# Altium PCB Project_Xe_Can_Bang.PcbDoc
Units mil, origin at the board's own origin, x right, y up, seen from the top; angles counter-clockwise.
Board outline 6000 x 4000 mil, 2 copper layers (Top Layer, Bottom Layer); 73 components, 90 nets, 295 pads, 0 vias.
Unrouted connection lines stored in the file: 185.
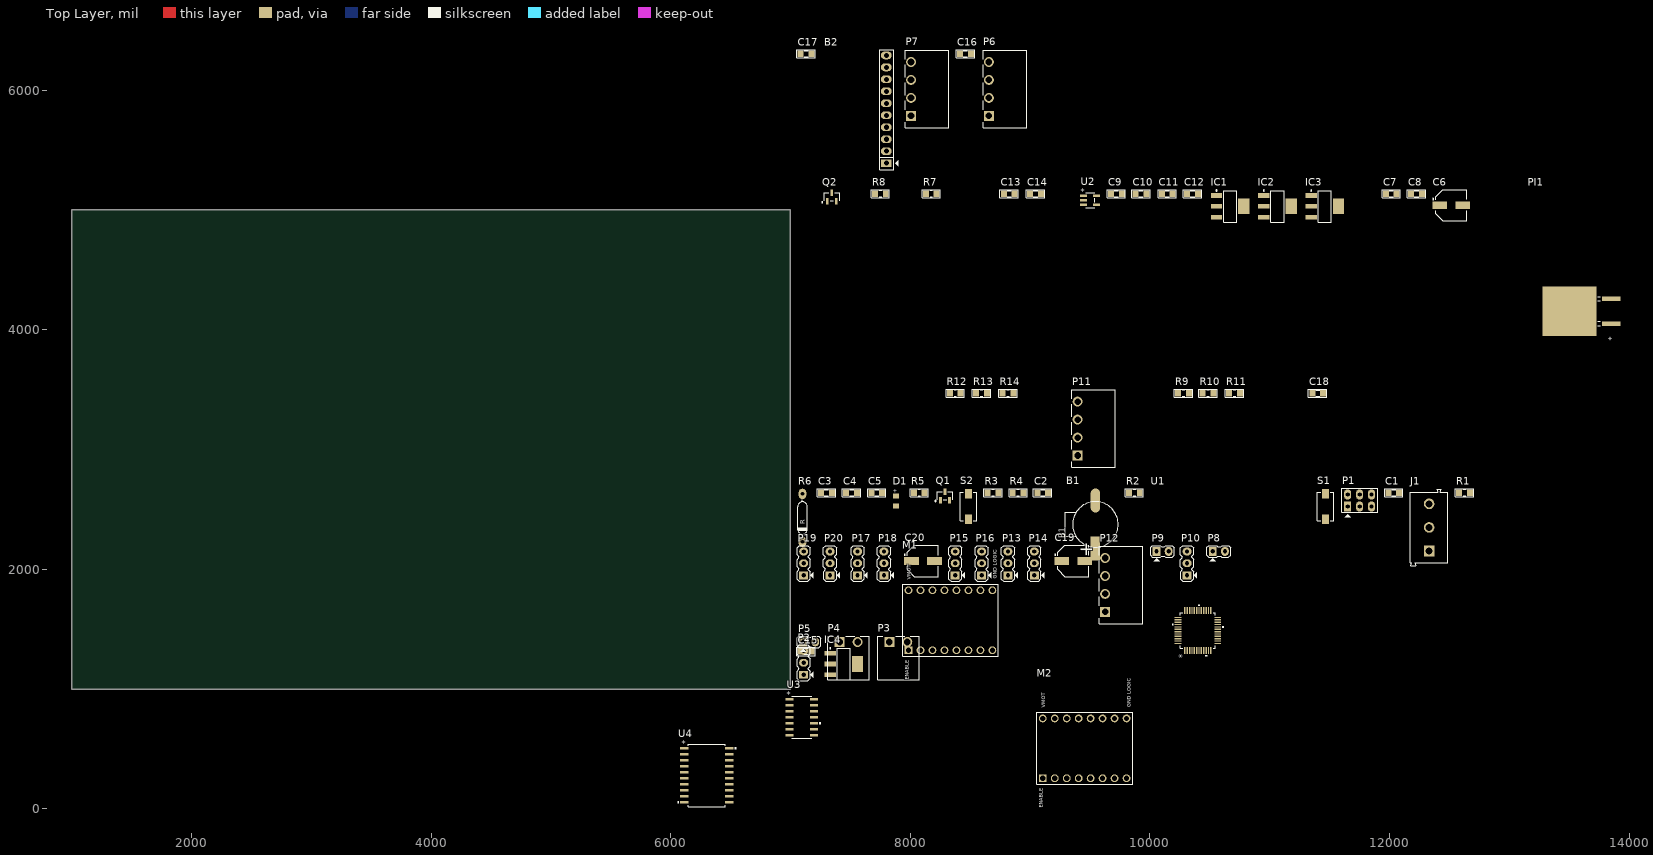
[diagram p0: Top Layer view]
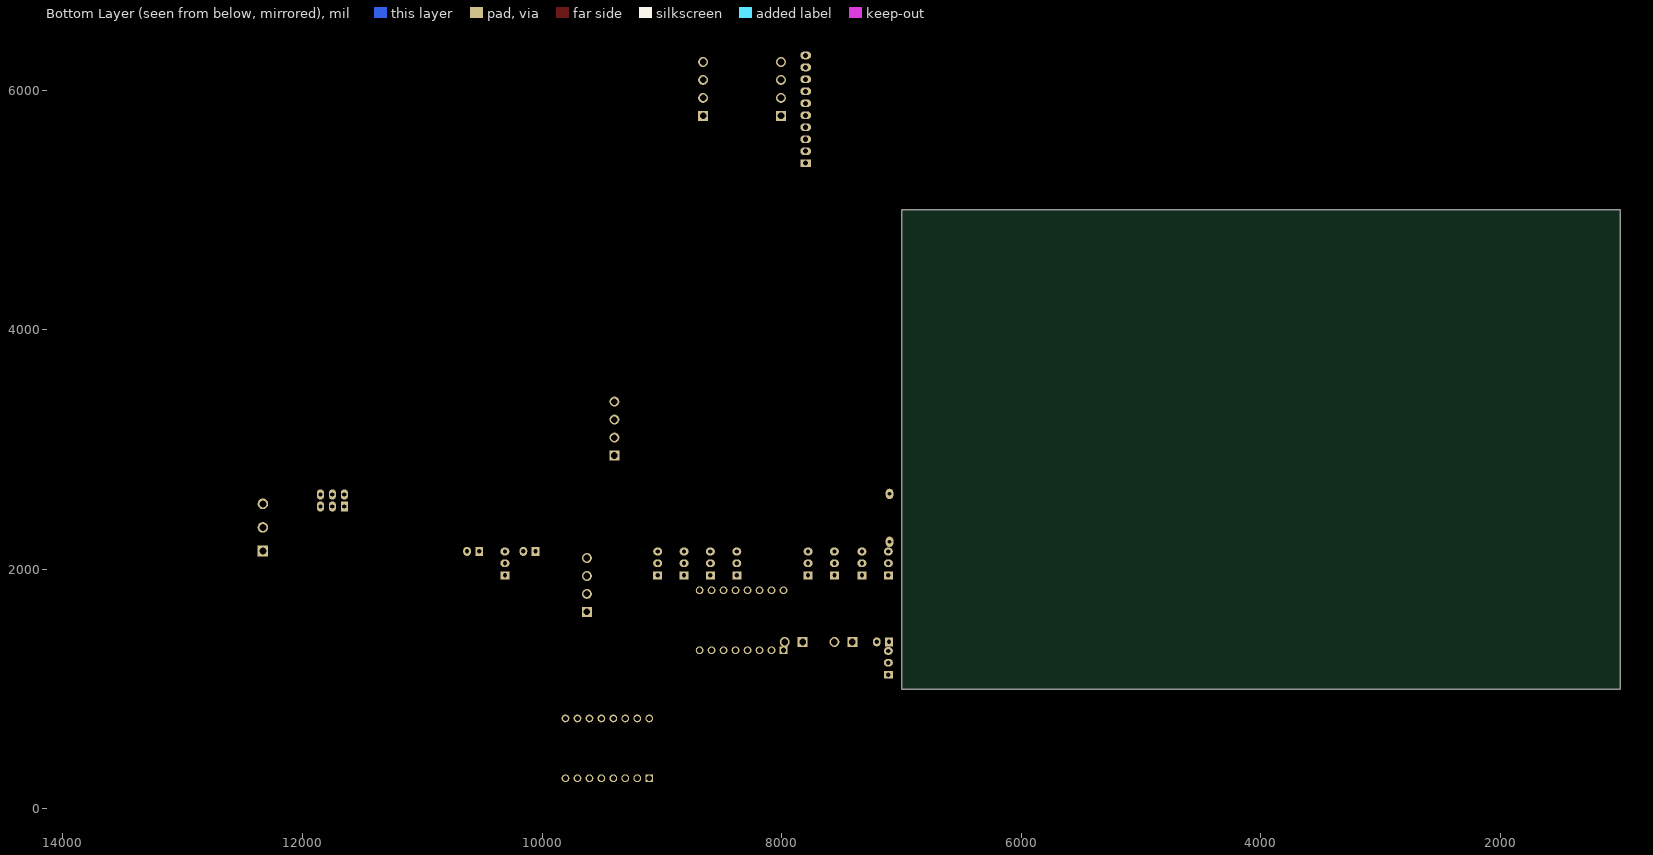
[diagram p1: Bottom Layer view, seen from below]

## Layer stack, top to bottom
Top Solder: solder mask 0.4, Solder Resist, Dk 3.5
Top Layer: signal copper 1.4
Dielectric 1: dielectric 12.6, FR-4, Dk 4.8
Bottom Layer: signal copper 1.4
Bottom Solder: solder mask 0.4, Solder Resist, Dk 3.5

## Board outline
1000,1000 7000,1000 7000,5000 1000,5000

## Design rules (kind name [scope] priority, off if disabled: settings)
Clearance [All] p1: gap=8 ignorepadtopadclearanceinfootprint=FALSE
DiffPairsRouting [All] p1: maxlimit=10 minlimit=8 mostfreqgap=10 toplayer_minwidth=8 toplayer_maxwidth=15 toplayer_prefwidth=10 bottomlayer_minwidth=8 bottomlayer_maxwidth=15 bottomlayer_prefwidth=10 maxuncoupledlength=500
Height [All] p1: minheight=0 maxheight=5000 prefheight=500
PolygonConnect [All] p1: connectstyle=Direct reliefconductorwidth=10 reliefentries=4 polygonreliefangle="90 Angle" airgapwidth=10
RoutingVias [All] p1: holewidth=15.75 width=31.5 viastyle="Through Hole" minholewidth=15.75 minwidth=31.5 maxholewidth=15.75 maxwidth=31.5
SolderMaskExpansion [All] p1: expansion=4
UnRoutedNet [All] p1: checkbadconnections=TRUE
Width [All] p1: maxlimit=15 minlimit=8 preferedwidth=10
27 further rules are at their usual default settings.

## Classes and differential pairs
component class Sensor: B2 C16 C17 P6 P7 ts U3
component class Power_Supply: C6 C7 C8 C9 C10 C11 C12 C13 C14 C15 IC1 IC2 IC3 IC4 P3 P4 P5 PI1 Q2 R7 R8 U2
component class Motor_Controller: C18 C19 M1 M2 M*1 M*2 P11 P15 P16 P17 P18 P19 P20 R8 R9 R11 R12 R13 R14 S3 S4 U4 U5
component class MCU: B1 C1 C2 C3 C4 C5 D1 J1 P1 Q1 R1 R2 R3 R4 R5 R6 S1 S2 U1

## Components (designator, comment, footprint, x,y, rotation, side; value= is the part's Value field where it differs from the comment)
B1 "Buzzer" "BUZZER SMD" 9545,2275 r90 top
B2 "MPU9250" MPU9250 7800,5390 r90 top
C1 "Cap-100nF-50V-0805" CAP-SM-0805 11990,2640 r0 top value=100nF/50V
C2 "Cap-100nF-50V-0805" CAP-SM-0805 9060,2640 r0 top value=100nF/50V
C3 "Cap-100nF-50V-0805" CAP-SM-0805 7255,2640 r0 top value=100nF/50V
C4 "Cap-100nF-50V-0805" CAP-SM-0805 7465,2640 r0 top value=100nF/50V
C5 "Cap-100nF-50V-0805" CAP-SM-0805 7675,2640 r0 top value=100nF/50V
C6 "Cap-Al-100uF-16V-D6L5" CAP-SM-AL-SIZE-D-D6L6 12515,5040 r0 top value=100uF/16V
C7 "Cap-10uF-50V-0805" CAP-SM-0805 11970,5135 r0 top value=10uF/50V
C8 "Cap-10uF-50V-0805" CAP-SM-0805 12180,5135 r0 top value=10uF/50V
C9 "Cap-10uF-50V-0805" CAP-SM-0805 9675,5135 r0 top value=10uF/50V
C10 "Cap-10uF-50V-0805" CAP-SM-0805 9880,5135 r0 top value=10uF/50V
C11 "Cap-10uF-50V-0805" CAP-SM-0805 10100,5135 r0 top value=10uF/50V
C12 "Cap-10uF-50V-0805" CAP-SM-0805 10310,5135 r0 top value=10uF/50V
C13 "Cap-100nF-50V-0805" CAP-SM-0805 8780,5135 r0 top value=100nF/50V
C14 "Cap-10uF-50V-0805" CAP-SM-0805 9000,5135 r0 top value=10uF/50V
C15 "Cap-10uF-50V-0805" CAP-SM-0805 7085,1315 r0 top value=10uF/50V
C16 "Cap-100nF-50V-0805" CAP-SM-0805 8415,6305 r0 top value=100nF/50V
C17 "Cap-100nF-50V-0805" CAP-SM-0805 7085,6305 r0 top value=100nF/50V
C18 "Cap-100nF-50V-0805" CAP-SM-0805 11355,3470 r0 top value=100nF/50V
C19 "Cap-Al-100uF-16V-D6L5" CAP-SM-AL-SIZE-D-D6L6 9360,2070 r0 top value=100uF/16V
C20 "Cap-Al-100uF-16V-D6L5" CAP-SM-AL-SIZE-D-D6L6 8105,2070 r0 top value=100uF/16V
D1 "Red, 2V" WL-SMCW_0805 7880,2570 r90 top
IC1 "AMS1117" SOT223 10670,5030 r0 top value=LM317
IC2 "AMS1117" SOT223 11065,5030 r0 top value=LM317
IC3 "AMS1117" SOT223 11460,5030 r0 top value=LM317
IC4 "AMS1117" SOT223 7445,1210 r0 top value=LM317
J1 "691111710003" 691111710003 12330,2350 r90 top
M1 "DRV8825" IC_DRV8825_STEPPER_MOTOR_DRIVER_CARRIER 8335,1575 r90 top
M2 "DRV8825" IC_DRV8825_STEPPER_MOTOR_DRIVER_CARRIER 9455,506 r90 top
P1 "Header 3X2" JP3x2 11650,2525 r0 top
P2 "Header 3" JP3 7110,1220 r90 top
P3 "691322310002" 691322310002 7900,1260 r0 top
P4 "691322310002" 691322310002 7485,1260 r0 top
P5 "Header 2" JP2 7105,1395 r0 top
P6 "691322310004" 691322310004 8790,6010 r90 top
P7 "691322310004" 691322310004 8140,6010 r90 top
P8 "Header 2" JP2 10525,2150 r0 top
P9 "Header 2" JP2 10055,2150 r0 top
P10 "Header 3" JP3 10310,2050 r90 top
P11 "691322310004" 691322310004 9530,3175 r90 top
P12 "691322310004" 691322310004 9760,1870 r90 top
P13 "Header 3" JP3 8815,2050 r90 top
P14 "Header 3" JP3 9035,2050 r90 top
P15 "Header 3" JP3 8375,2050 r90 top
P16 "Header 3" JP3 8595,2050 r90 top
P17 "Header 3" JP3 7560,2050 r90 top
P18 "Header 3" JP3 7780,2050 r90 top
P19 "Header 3" JP3 7110,2050 r90 top
P20 "Header 3" JP3 7330,2050 r90 top
PI1 "L7805-SMD" D2PAK_STM 13500,4155 r90 top
Q1 "MMBT3904-1AM" SOT23_NEX 8290,2615 r0 top
Q2 "MMBT3904-1AM" SOT23_NEX 7345,5110 r0 top
R1 "Res-10k-0805" RES-SM-0805 12580,2640 r0 top value=10K
R2 "Res-10k-0805" RES-SM-0805 9825,2640 r0 top value=10K
R3 "Res-100K-0805" RES-SM-0805 8645,2640 r0 top value=100K
R4 "Res-15K-0805" RES-SM-0805 8855,2640 r0 top value=15K
R5 "Res-100K-0805" RES-SM-0805 8030,2640 r0 top value=100K
R6 "Resistor 1/4W" "RES 1/4W" 7100,2230 r90 top value=1K
R7 "Res-4.7K-0805" RES-SM-0805 8130,5135 r0 top value=4.7K
R8 "Res-100K-0805" RES-SM-0805 7705,5135 r0 top value=100K
R9 "Res-1K-0805" RES-SM-0805 10235,3470 r0 top value=1K
R10 "Res-1K-0805" RES-SM-0805 10440,3470 r0 top value=1K
R11 "Res-1K-0805" RES-SM-0805 10660,3470 r0 top value=1K
R12 "Res-1K-0805" RES-SM-0805 8330,3470 r0 top value=1K
R13 "Res-1K-0805" RES-SM-0805 8550,3470 r0 top value=1K
R14 "Res-1K-0805" RES-SM-0805 8770,3470 r0 top value=1K
S1 "434113043826" 434113043826 11465,2525 r90 top
S2 "434113043826" 434113043826 8485,2525 r90 top
U1 "Part Number: STM32F103C8T6" "LQFP - 48" 10400,1490 r90 top value=Value
U2 "XC6204B332MR" XC6204/05_SOT-00 9500,5080 r0 top
U3 "74HC14D,652" SOT108-1_NEX 7095,766 r0 top
U4 "74HC245D,652" SOT163-1_NEX 6302,281 r0 top

## Footprints (in the part's own frame and the unit in brackets; to place one, negate y for a bottom-side part, rotate by r counter-clockwise, add the part's x,y. Pads: shape width x height; smd on the part's side, far side on the other; paste and mask are expansions set on the pad)
434113043826 [mm] "SMD Tact Switch, body 6x3.5mm"
  rect 2x1.5 smd: 1(-2.7,0) 2(2.7,0)
  silkscreen extent -3,-1.75 3,1.75, body extent -3.65,-1.75 3.65,1.75, height 4.3
691111710003 [mm] "5,00mm - modular - green - Horizontal entry with pressure clamp - 10,0mm height - 03p"
  rect 2.25x2.25 hole 1.5: 1(-5,0)
  round 2.25 hole 1.5: 2(0,0) 3(5,0)
  silkscreen extent -8.1,-4 8.1,4, body extent -8.1,-4 8.1,4, height 11.05
691322310002 [mm] "Horizontal PCB Header, pitch 3.81mm, 02p"
  rect 2.1x2.1 hole 1.4: 1(-1.905,3.4)
  round 2.1 hole 1.4: 2(1.905,3.4)
  silkscreen extent -4.4,-4.6 4.41,4.6, body extent -4.4,-4.6 4.41,4.6, height 7.25
691322310004 [mm] "Horizontal PCB Header, pitch 3.81mm, 04p"
  rect 2.1x2.1 hole 1.4: 1(-5.715,3.4)
  round 2.1 hole 1.4: 2(-1.905,3.4) 3(1.905,3.4) 4(5.715,3.4)
  silkscreen extent -8.21,-4.6 8.22,4.6, body extent -8.21,-4.6 8.21,4.6, height 7.25
"BUZZER SMD" [mil]
  rect 200x80 smd: 1(-100,0)
  oval 200x80 smd: 2(300,0)
  silkscreen extent -90,-190 290,250
CAP-SM-0805 [mil]
  rect 50x55 smd: 1(0,0) 2(90,0)
  silkscreen extent -32,-34 121,33, body extent 6,-25 84,25, height 31
CAP-SM-AL-SIZE-D-D6L6 [mm] "WH6.6"
  rect 3.15x1.6 smd: 1(-2.45,0) 2(2.45,0)
  silkscreen extent -3.95,-3.3 3.3,3.3, body extent -3.9,-3.4 3.9,3.4, height 5.7
D2PAK_STM [mil]
  rect 39x154 smd paste+0 mask+0: 1(-103.94,-349.5) 3(103.94,-349.5)
  rect 411x451 smd paste+0 mask+0: 2(0,0)
  silkscreen extent -122,-258 122,-239, body extent 0,0 10,10, height 10
IC_DRV8825_STEPPER_MOTOR_DRIVER_CARRIER [mm]
  rect 1.65x1.65 hole 1.1: 1(-6.35,8.89)
  round 1.65 hole 1.1: 2(-6.35,6.35) 3(-6.35,3.81) 4(-6.35,1.27) 5(-6.35,-1.27) 6(-6.35,-3.81) 7(-6.35,-6.35) 8(-6.35,-8.89) 9(6.35,-8.89) 10(6.35,-6.35) 11(6.35,-3.81) 12(6.35,-1.27) 13(6.35,1.27) 14(6.35,3.81) 15(6.35,6.35) 16(6.35,8.89)
  silkscreen extent -7.62,-10.16 7.62,10.16, body extent -7.5,-10.29 7.5,10.03, height 13.82
JP2 [mil]
  rect 65x75 hole 36: 1(0,0)
  oval 65x75 hole 36: 2(101,0)
  silkscreen extent -49,-81 148,48, body extent -48,-50 148,48, height 323
JP3 [mil] "Jumper 3"
  rect 65x75 hole 36: 1(-100,0)
  oval 65x75 hole 36: 2(1,0) 3(99,0)
  silkscreen extent -150,-81 149,55, body extent -150,-60 150,55, height 355
JP3x2 [mil] "Connector 3x2"
  rect 60x86 hole 36: 1(0,0)
  oval 60x86 hole 36: 2(0,100) 3(100,0) 4(100,100) 5(200,0) 6(200,100)
  silkscreen extent -50,-91 253,150, body extent -50,-50 250,150, height 335
"LQFP - 48" [mil]
  rect 58x11 smd: 1(-166,108.27) 2(-166,88.58) 3(-166,68.9) 4(-166,49.21) 5(-166,29.53) 6(-166,9.84) 7(-166,-9.84) 8(-166,-29.53) 9(-166,-49.21) 10(-166,-68.9) 11(-166,-88.58) 12(-166,-108.27) 25(166,-108.27) 26(166,-88.58) 27(166,-68.9) 28(166,-49.21) 29(166,-29.53) 30(166,-9.84) 31(166,9.84) 32(166,29.53) 33(166,49.21) 34(166,68.9) 35(166,88.58) 36(166,108.27)
  rect 11x58 smd: 13(-108.27,-166) 14(-88.58,-166) 15(-68.9,-166) 16(-49.21,-166) 17(-29.53,-166) 18(-9.84,-166) 19(9.84,-166) 20(29.53,-166) 21(49.21,-166) 22(68.9,-166) 23(88.58,-166) 24(108.27,-166) 37(108.27,166) 38(88.58,166) 39(68.9,166) 40(49.21,166) 41(29.53,166) 42(9.84,166) 43(-9.84,166) 44(-29.53,166) 45(-49.21,166) 46(-68.9,166) 47(-88.58,166) 48(-108.27,166)
  silkscreen extent -215,-215 215,215, body extent -175,-178 180,178, height 59
MPU9250 [mil] "JP8"
  rect 65x90 hole 42: 1(0,0)
  oval 65x90 hole 42: 2(100,0) 3(200,0) 4(300,0) 5(400,0) 6(500,0) 7(600,0) 7(800,0) 8(700,0) 8(900,0)
  silkscreen extent -56,-100 945,57, body extent -50,-61 950,530, height 267
"RES 1/4W" [mm]
  oval 2.2x1.6 hole 0.787: 1(0,0) 2(10.16,0)
  silkscreen extent 1.26,-1.02 8.88,1.02, body extent -0.3,-1.16 10.46,1.16, height 2.93
RES-SM-0805 [mil]
  rect 50x55 smd: 1(0,0) 2(90,0)
  silkscreen extent -31,-34 121,34, body extent -5,-24 95,25, height 20
SOT23_NEX [mil]
  rect 22x52 smd paste+0 mask+4: 1(-37.5,-37.21) 2(37.5,-37.21) 3(0,33.36)
  silkscreen extent -85,-50 64,32, body extent -59,-54 59,44, height 43
SOT108-1_NEX [mil]
  rect 67x21 smd paste+0 mask+0: 1(-102.5,150) 2(-102.5,100) 3(-102.5,50) 4(-102.5,0) 5(-102.5,-50) 6(-102.5,-100) 7(-102.5,-150) 8(102.5,-150) 9(102.5,-100) 10(102.5,-50) 11(102.5,0) 12(102.5,50) 13(102.5,100) 14(102.5,150)
  silkscreen extent -84,-177 156,177, body extent 0,0 10,10, height 10
SOT163-1_NEX [mil]
  rect 71x21 smd paste+0 mask+0: 1(-188,225) 2(-188,175) 3(-188,125) 4(-188,75) 5(-188,25) 6(-188,-25) 7(-188,-75) 8(-188,-125) 9(-188,-175) 10(-188,-225) 11(188,-225) 12(188,-175) 13(188,-125) 14(188,-75) 15(188,-25) 16(188,25) 17(188,75) 18(188,125) 19(188,175) 20(188,225)
  silkscreen extent -244,-261 244,261, body extent 0,0 10,10, height 10
SOT223 [mm] "SOT223, 4-Leads, Body 6.5x3.5mm, Pitch 2.3mm, Lead Span 7mm, IPC Medium Density"
  rect 2.4x1 smd: 1(-2.9,2.3) 2(-2.9,0) 3(-2.9,-2.3)
  rect 2.4x3.3 smd: 4(2.9,0)
  silkscreen extent -3.02,-3.35 1.4,3.47, body extent -3.39,-3.27 3.5,3.23, height 1.72
WL-SMCW_0805 [mm] "SMD Mono-color Chip LED, body 2.0x1.25mm"
  rect 1.1x1.2 smd: 1(-1.05,0) 2(1.05,0)
  body extent -1,-0.63 1,0.62, height 0.7
XC6204/05_SOT-00 [mil]
  rect 60x21 smd: 1(-54.75,37.4) 2(-54.75,0) 3(-54.75,-37.4) 4(54.75,-37.4) 5(54.75,37.4)
  silkscreen extent -38,-62 38,62, body extent -56,-57 54,57, height 51

## Part data
C1 C2 C3 C4 C5 C13 C16 C17 C18: "CAP CER 0.1UF 50V Y5V 0805", Manufacturer="Samsung Electro-Mechanics", Manufacturer Part Number=CL21F104ZBCNNNC, Supplier 1 Part Number=1276-1007-1-ND, Local Supplier=thegioiic, Local Supplier Link=https://thegioiic.com/products/tu-100nf-0-1uf-50v-0805, Supplier 1=Digikey, Supplier 1 Link=https://www.digikey.com/product-detail/en/samsung-electro-mechanics/CL21F104ZBCNNNC/1276-1007-1-ND/3889093
C6 C19 C20: "CAP ALUM 100UF 20% 16V SMD", Manufacturer=Nichicon, Manufacturer Part Number=UWX1C101MCL1GB, Supplier 1 Part Number=493-2105-1-ND, Local Supplier=thegioiic, Local Supplier Link=https://thegioiic.com/products/tu-nhom-smd-100uf-16v-d6-3l5-4, Supplier 1=Digikey, Supplier 1 Link=https://www.digikey.com/product-detail/en/nichicon/UWX1C101MCL1GB/493-2105-1-ND/590080
C7 C8 C9 C10 C11 C12 C14 C15: "CAP CER 10UF 50V X5R 0805", Manufacturer=Yageo, Manufacturer Part Number=CC0805KKX5R9BB106, Supplier 1 Part Number=311-3499-2-ND, Local Supplier=thegioiic, Local Supplier Link=https://thegioiic.com/products/tu-10uf-50v-0805, Supplier 1=Digikey, Supplier 1 Link=https://www.digikey.com/product-detail/en/yageo/CC0805KKX5R9BB106/311-3499-2-ND/7164383
D1: library part 150080RS75000, "WL-SMCW SMT Mono-color Chip LED Waterclear, size 0805, Red, 2V, 140deg", Emitting Color=Red, Forward Voltage typ.=2V, Operating Temperature="-40 to +85degC", Chip Technology=AlInGaP, ComponentLink1Description=Manufacturer, ComponentLink1URL=http://www.we-online.de, ComponentLink2Description=Datasheet, ComponentLink2URL=https://www.we-online.com/catalog/datasheet/150080RS75000.pdf, Dominant Wavelength typ.=625nm, Luminous Intensity typ.=150mcd, Mounting Technology=SMT, Packaging="Tape and Reel", Part Number=150080RS75000, Peak Wavelength typ.=630nm, Published Date="December 2019", Publisher="Wurth Elektronik", Size=0805, Viewing Angle=140deg
IC1 IC2 IC3 IC4: "Available in 1.8V, 2.5V, 2.85V, 3.3V, 5V, and  Adjustable Versions"
J1: "WR-TBL Serie 111 Horizontal Entry Modular, Pressure Clamp, pitch 5mm, 3p", Operating Temperature="-40 to +105degC", Rated Current [UL]=15A, Working Voltage [UL]=250VAC, Application="Pressure Clamp", Compliance="Lead free / RoHS", ComponentLink1Description=Manufacturer, ComponentLink1URL=http://www.we-online.de, ComponentLink2Description=Datasheet, ComponentLink2URL=https://katalog.we-online.de/em/datasheet/691111710003.pdf, Modularity=Yes, Mounting Technology=THT, Packaging=Box, Part Number=691111710003, PCB/Cable/Panel=PCB, Pin Number=3, Pitch=5mm, Published Date="October 2019", Publisher="Wurth Elektronik", Type=Horizontal
P1: "Header, 3-Pin, Dual row", LatestRevisionDate=17-Jul-2002, LatestRevisionNote="Re-released for DXP Platform.", Publisher="Altium Limited"
P2 P10 P13 P14 P15 P16 P17 P18 P19 P20: "Header, 3-Pin", LatestRevisionDate=17-Jul-2002, LatestRevisionNote="Re-released for DXP Platform.", Publisher="Altium Limited"
P3 P4: "WR-TBL Serie 322 Horizontal PCB Header, Pluggable, pitch 3.81mm, 2p", Operating Temperature="-40 to +105degC", Rated Current [UL]=10A, Working Voltage [UL]=300VAC, Application=Pluggable, Compliance=RoHS, ComponentLink1Description=Manufacturer, ComponentLink1URL=http://www.we-online.de, ComponentLink2Description=Datasheet, ComponentLink2URL=https://katalog.we-online.de/em/datasheet/691322310002.pdf, Modularity=No, Mounting Technology=THT, Packaging=Box, Part Number=691322310002, PCB/Cable/Panel=PCB, Pin Number=2, Pitch=3.81mm, Published Date="October 2019", Publisher="Wurth Elektronik", Type=Horizontal
P5 P8 P9: "Header, 2-Pin", LatestRevisionDate=17-Jul-2002, LatestRevisionNote="Re-released for DXP Platform.", Publisher="Altium Limited"
P6 P7 P11 P12: "WR-TBL Serie 322 Horizontal PCB Header, Pluggable, pitch 3.81mm, 4p", Operating Temperature="-40 to +105degC", Rated Current [UL]=10A, Working Voltage [UL]=300VAC, Application=Pluggable, Compliance=RoHS, ComponentLink1Description=Manufacturer, ComponentLink1URL=http://www.we-online.de, ComponentLink2Description=Datasheet, ComponentLink2URL=https://katalog.we-online.de/em/datasheet/691322310004.pdf, Modularity=No, Mounting Technology=THT, Packaging=Box, Part Number=691322310004, PCB/Cable/Panel=PCB, Pin Number=4, Pitch=3.81mm, Published Date="October 2019", Publisher="Wurth Elektronik", Type=Horizontal
PI1: library part L7805CD2T-TR, "No Description Available", Built_By=EMA_UL_Team, Copyright="Copyright (C) 2018 Accelerated Designs. All rights reserved", Manufacturer_Part_Number=L7805CD2T-TR, RefDes=RefDes, SourceLibrary=StMicro_2011-06-07, Type=DEV, Vendor=STMicroelectronics
R1 R2: "RES 10K OHM 1% 1/4W 0805", Manufacturer="Stackpole Electronics Inc", Manufacturer Part Number=RNCP0805FTD10K0, Supplier 1 Part Number=RNCP0805FTD10K0CT-ND, Local Supplier=thegioiic, Local Supplier Link=https://thegioiic.com/products/dien-tro-10k-ohm-0805-5, Supplier 1=Digikey, Supplier 1 Link=https://www.digikey.com/product-detail/en/stackpole-electronics-inc/RNCP0805FTD10K0/RNCP0805FTD10K0CT-ND/2240601
R3 R5 R8: "RES 0 OHM JUMPER 0805", Manufacturer="Vishay Dale", Manufacturer Part Number=WSL080500000ZEA9, Supplier 1 Part Number=541-3928-1-ND, Local Supplier=thegioiic, Local Supplier Link=https://thegioiic.com/products/dien-tro-0-ohm-0805-5, Supplier 1=Digikey, Supplier 1 Link=https://www.digikey.com/product-detail/en/vishay-dale/WSL080500000ZEA9/541-3928-1-ND/7423223
R4: "RES 15K OHM 1% 1/4W 0805", Manufacturer="TE Connectivity Passive Product", Manufacturer Part Number=CRGCQ0805F15K, Supplier 1 Part Number=A129763CT-ND, Local Supplier=thegioiic, Local Supplier Link=https://thegioiic.com/products/dien-tro-15k-ohm-0805-1, Supplier 1=Digikey, Supplier 1 Link=https://www.digikey.com/product-detail/en/te-connectivity-passive-product/CRGCQ0805F15K/A129763CT-ND/8577595
R6: library part Res
R7: "RES SMD 4.7K OHM 5% 1/8W 0805", Manufacturer=Yageo, Manufacturer Part Number=RC0805JR-074K7L, Supplier 1 Part Number=311-4.7KARCT-ND, Local Supplier=thegioiic, Local Supplier Link=https://thegioiic.com/products/dien-tro-4-7k-ohm-0805-5, Supplier 1=Digikey, Supplier 1 Link=https://www.digikey.com/product-detail/en/yageo/RC0805JR-074K7L/311-4.7KARCT-ND/731274
R9 R10 R11 R12 R13 R14: "RES 1K OHM 1% 1/4W 0805", Manufacturer="Stackpole Electronics Inc", Manufacturer Part Number=RNCP0805FTD1K00, Supplier 1 Part Number=RNCP0805FTD1K00CT-ND, Local Supplier=thegioiic, Local Supplier Link=https://thegioiic.com/products/dien-tro-1k-ohm-0805-5, Supplier 1=Digikey, Supplier 1 Link=https://www.digikey.com/product-detail/en/stackpole-electronics-inc/RNCP0805FTD1K00/RNCP0805FTD1K00CT-ND/2240568
S1 S2: "WS-TASV J-Bend SMT Tact Switch 6x3.5mm, height 4.3mm, 260gf", Operating Temperature="-40 to +85degC", Rated Current=50mA, Rated Voltage=12VDC, ComponentLink1Description=Manufacturer, ComponentLink1URL=http://www.we-online.de, ComponentLink2Description=Datasheet, ComponentLink2URL=https://katalog.we-online.com/em/datasheet/434113043826.pdf, Contact Material="Stainless Steel", Contact Plating=Silver, Height=4.3mm, Mounting Technology=SMT, Operation Force=260gf, Packaging="Tape and Reel", Part Number=434113043826, Published Date="September 2019", Publisher="Wurth Elektronik", Terminal Material="Copper Alloy", Terminal Plating=Silver, Washable=No
U1: library part STM32F103C8T6, Built_By=EMA_UL_Team, Copyright="Copyright (C) 2018 Accelerated Designs. All rights reserved", Manufacturer_Part_Number=STM32F103C8T6, RefDes=RefDes, Type=DEV, Vendor=STMicroelectronics
U3 U4: "No Description Available", Copyright="Copyright (C) 2016 Accelerated Designs. All rights reserved", RefDes=RefDes, SourceLibrary=Nexperia_2018-05-2018, Type=DEV, Vendor=Nexperia
  U3: Manufacturer_Part_Number=74HC14D,652
  U4: Manufacturer_Part_Number=74HC245D,652
U2: Built_By=EMA_UL_Team, Copyright="Copyright (C) 2018 Accelerated Designs. All rights reserved", Manufacturer_Part_Number=XC6204B332MR, RefDes=RefDes, SourceLibrary=Torex_2016-07-05_1, Type=DEV, Vendor="Torex Semiconductor"

## Nets (pads, with @x,y where several pads share a name; then routed paths per layer and width w, separated by ;. In a path a pad name is that pad's centre, name@x,y a point inside that pad or via, vN(x,y) a via of type N, cw(c..) or ccw(c..) an arc to the next point about the centre after c; other vN are vias at no path point)
3V3_BLU: C15.2 IC4.2 IC4.4
3V3_DWM: C12.2 IC3.2 IC3.4
3V3_ENC: P6.1 P7.1
3V3_MC: B2.1 C3.2 C4.1 C5.2 C10.2 C11.2 C16.2 C17.2 D1.2 IC2.2 IC2.4 M1.5 M1.6 M2.5 M2.6 P1.1 P1.2 P10.1 R1.2 R2.2 R9.1 R10.1 R11.1 U1.9 U1.24 U1.36 U1.48 U3.14
3V3_RF: C14.2 U2.5
3V3_WIFI: C9.2 IC1.2 IC1.4
5V: B1.1 C8.2 C13.2 IC2.3 IC3.3 IC4.3 J1.1 P3.1 P5.1 PI1.3 R7.2 U2.1
5V_WIFI: IC1.3 P5.2
12V: C6.1 C7.2 P4.1 P8.1 P9.1 PI1.1
12V_STEP: C19.1 C20.1 M1.16 M2.16 P8.2 P9.2
BOOT0: R3.2
BOOT1: P1.4 R5.2 U1.19
BTN: C2.2 R2.1 S2.1 U1.18
Buzzer: R4.1 U1.2
ENC_1A: P6.2 U3.1
ENC_1B: P6.3 U3.3
ENC_2A: P7.2 U3.5
ENC_2B: P7.3 U3.9
GND: B2.2 C1.1 C2.1 C3.1 C4.2 C5.1 C6.2 C7.1 C8.1 C9.1 C10.1 C11.1 C12.1 C13.1 C14.1 C15.1 C16.1 C17.1 C18.1 C19.2 C20.2 IC1.1 IC2.1 IC3.1 IC4.1 J1.3 M1.9 M1.15 M2.9 M2.15 P1.5 P1.6 P2.3 P3.2 P4.2 P6.4 P7.4 P10.3 P15.3 P16.3 P19.3 P20.3 PI1.2 Q1.2 Q2.2 S1.2 S2.2 U1.8 U1.23 U1.35 U1.47 U2.2 U3.7 U4.10 U4.19
LED: J1.2 R6.2 U1.29
MTR1_A1: M1.12 P13.1
MTR1_A2: M1.11 P14.1
MTR1_B1: M1.13 P15.1
MTR1_B2: M1.14 P16.1
MTR1_C1: P11.1 P13.2
MTR1_C2: P11.2 P14.2
MTR1_C3: P11.3 P15.2
MTR1_C4: P11.4 P16.2
MTR1_DIR: M1.8 P14.3 U4.17
MTR1_ENB: M1.1 U4.14
MTR1_PWM: M1.7 P13.3 U4.18
MTR2_A1: M2.12 P17.1
MTR2_A2: M2.11 P18.1
MTR2_B1: M2.13 P19.1
MTR2_B2: M2.14 P20.1
MTR2_C1: P12.1 P17.2
MTR2_C2: P12.2 P18.2
MTR2_C3: P12.3 P19.2
MTR2_C4: P12.4 P20.2
MTR2_DIR: M2.8 P18.3 U4.15
MTR2_ENB: M2.1 U4.13
MTR2_PWM: M2.7 P17.3 U4.16
NetB1_2: B1.2 Q1.3
NetB2_3: B2.3 U1.45
NetB2_4: B2.4 U1.46
NetD1_1: D1.1 R6.1
NetM1_2: M1.2 R9.2
NetM1_3: M1.3 R10.2
NetM1_4: M1.4 R11.2
NetM2_2: M2.2 R12.2
NetM2_3: M2.3 R13.2
NetM2_4: M2.4 R14.2
NetQ1_1: Q1.1 R4.2
NetQ2_1: Q2.1 R8.2
NetQ2_3: Q2.3 R7.1 U2.3
NetR3_1: R3.1 U1.44
NetR5_1: R5.1 U1.20
NetR8_1: R8.1 U1.15
NetR12_1: R12.1 R13.1 R14.1
NetU1_3: U1.3 U4.3
NetU1_4: U1.4 U4.6
NetU1_5: U1.5 U4.5
NetU1_6: U1.6 U4.7
NetU1_10: U1.10 U4.2
NetU1_11: U1.11 U4.4
NetU1_12: U1.12
NetU1_13: U1.13
NetU1_14: U1.14
NetU1_16: U1.16 U3.2
NetU1_17: U1.17 U3.4
NetU1_21: U1.21
NetU1_22: U1.22
NetU1_25: U1.25
NetU1_26: U1.26
NetU1_27: U1.27
NetU1_28: U1.28
NetU1_30: U1.30
NetU1_31: U1.31
NetU1_32: U1.32
NetU1_33: U1.33
NetU1_38: U1.38
NetU1_39: U1.39
NetU1_40: U1.40
NetU1_41: U1.41
NetU1_42: U1.42 U3.8
NetU1_43: U1.43 U3.6
NRST: C1.2 R1.1 S1.1 U1.7
SWCLK: P2.2 U1.37
SWDIO: P2.1 U1.34
VCC_245: C18.2 P10.2 U4.1 U4.20
pads on no net: B2.5 B2.6 B2.7 B2.8 M1.10 M2.10 P1.3 U1.1 U2.4 U3.10 U3.11 U3.12 U3.13 U4.8 U4.9 U4.11 U4.12

## Text inside footprints (layer, text, board x,y; h text height)
B1: Top Overlay "+" at 9520,2100 h112.5 r90
D1: Top Overlay "+" at 7891.81,2670.39 h30 r180
M1: Top Overlay "ENABLE" at 7985,1080 h30 r90; Top Overlay "GND LOGIC" at 8720,1920 h30 r90; Top Overlay "VMOT" at 8005,1915 h30 r90
M2: Top Overlay "VMOT" at 9125,846 h30 r90; Top Overlay "GND LOGIC" at 9840,851 h30 r90; Top Overlay "ENABLE" at 9105,11 h30 r90
PI1: Top Overlay "*" at 13874.5,3909.63 h50 r90; Mechanical 13 "*" at 13726.5,4038.56 h50 r90
R6: Top Overlay "R" at 7120.5,2377.5 h39.37 r90
U1: Top Overlay "*" at 10291.89,1257.5 h50 r90; Mechanical 13 "*" at 10306.89,1350.5 h50 r90
U2: Top Overlay "*" at 9422.75,5129.4 h50
U3: Top Overlay "*" at 6970,932 h50; Mechanical 13 "*" at 7019,885 h50
U4: Top Overlay "*" at 6091.5,522 h50; Mechanical 13 "*" at 6155,484 h50